# Altium PCB m6_base.PcbDoc
Units mm, origin at the board's own origin, x right, y up, seen from the top; angles counter-clockwise.
Board outline 66 x 85 mm, 2 copper layers (Top Layer, Bottom Layer); 59 components, 64 nets, 244 pads, 162 vias.
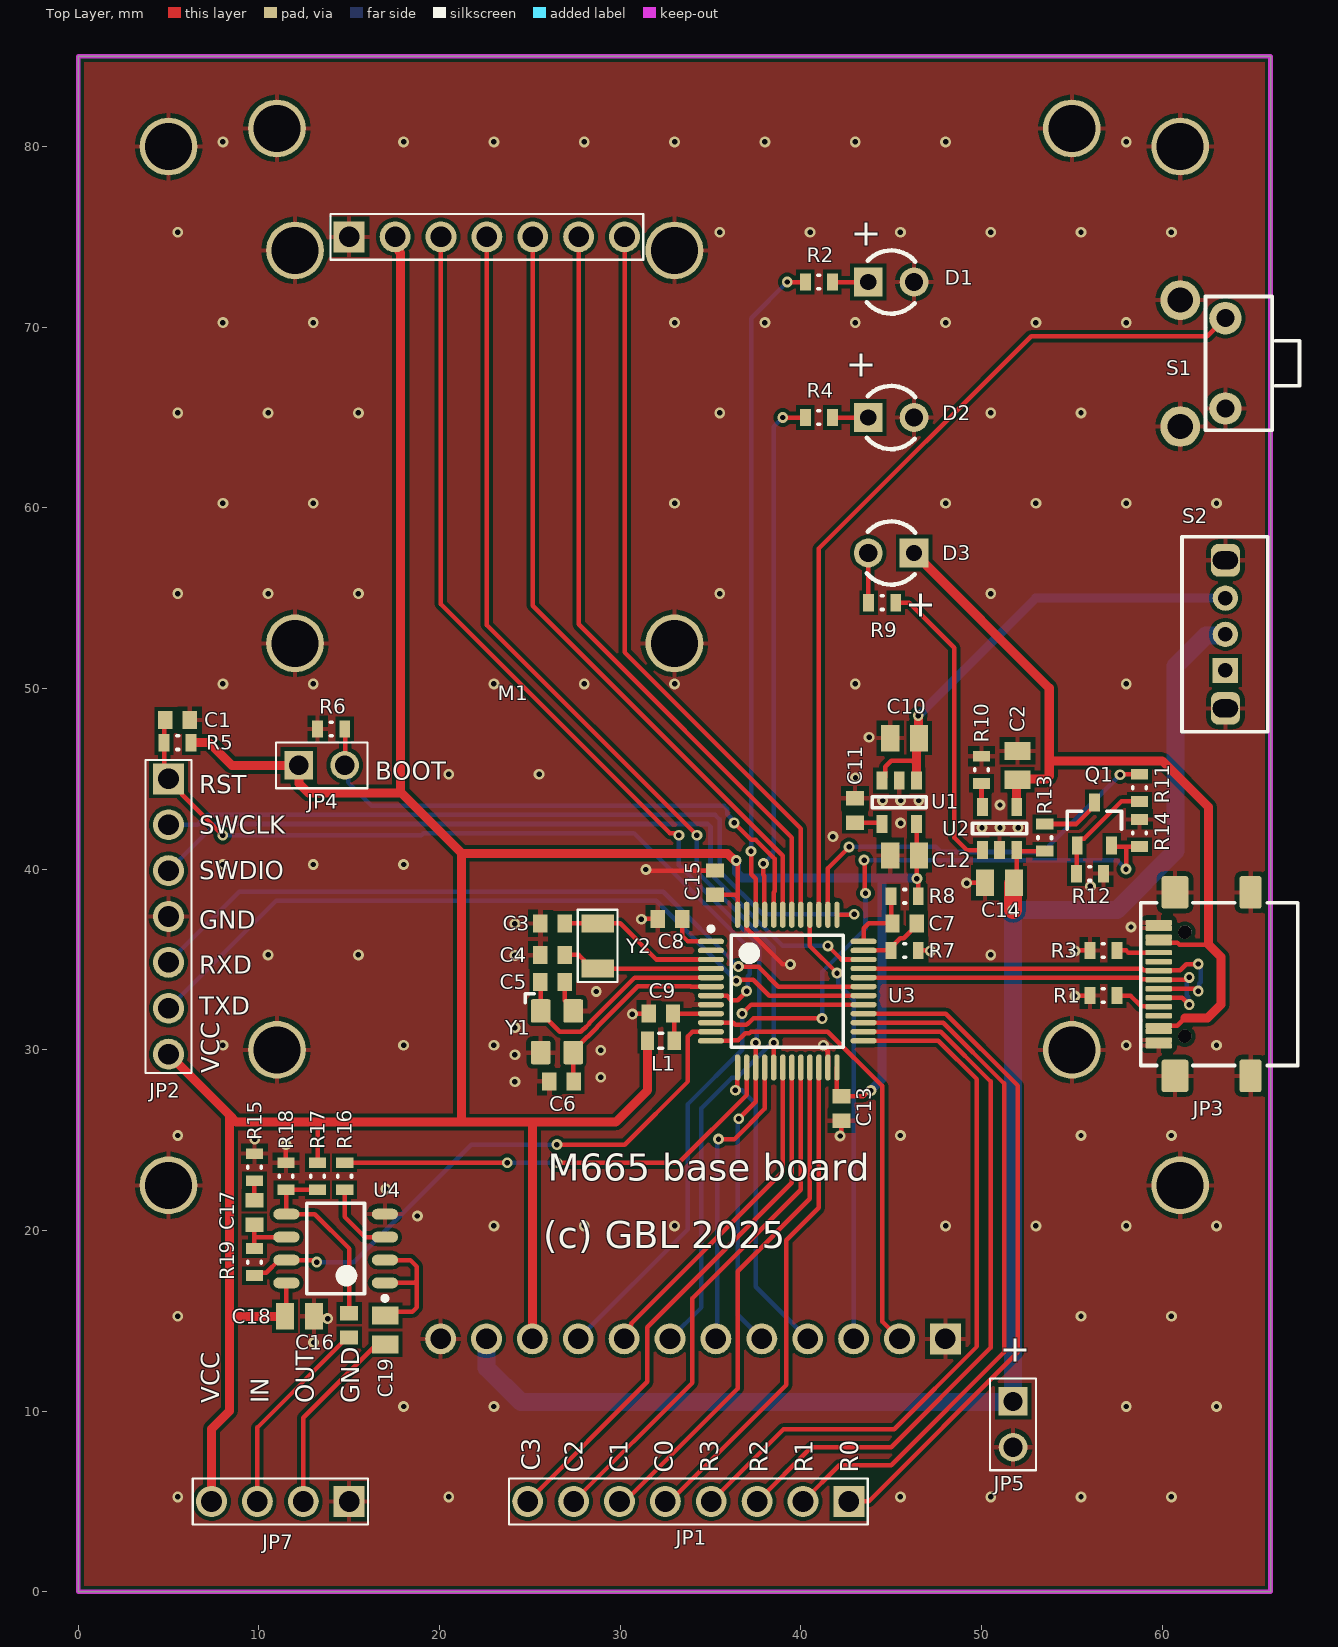
[diagram p0: Top Layer view]
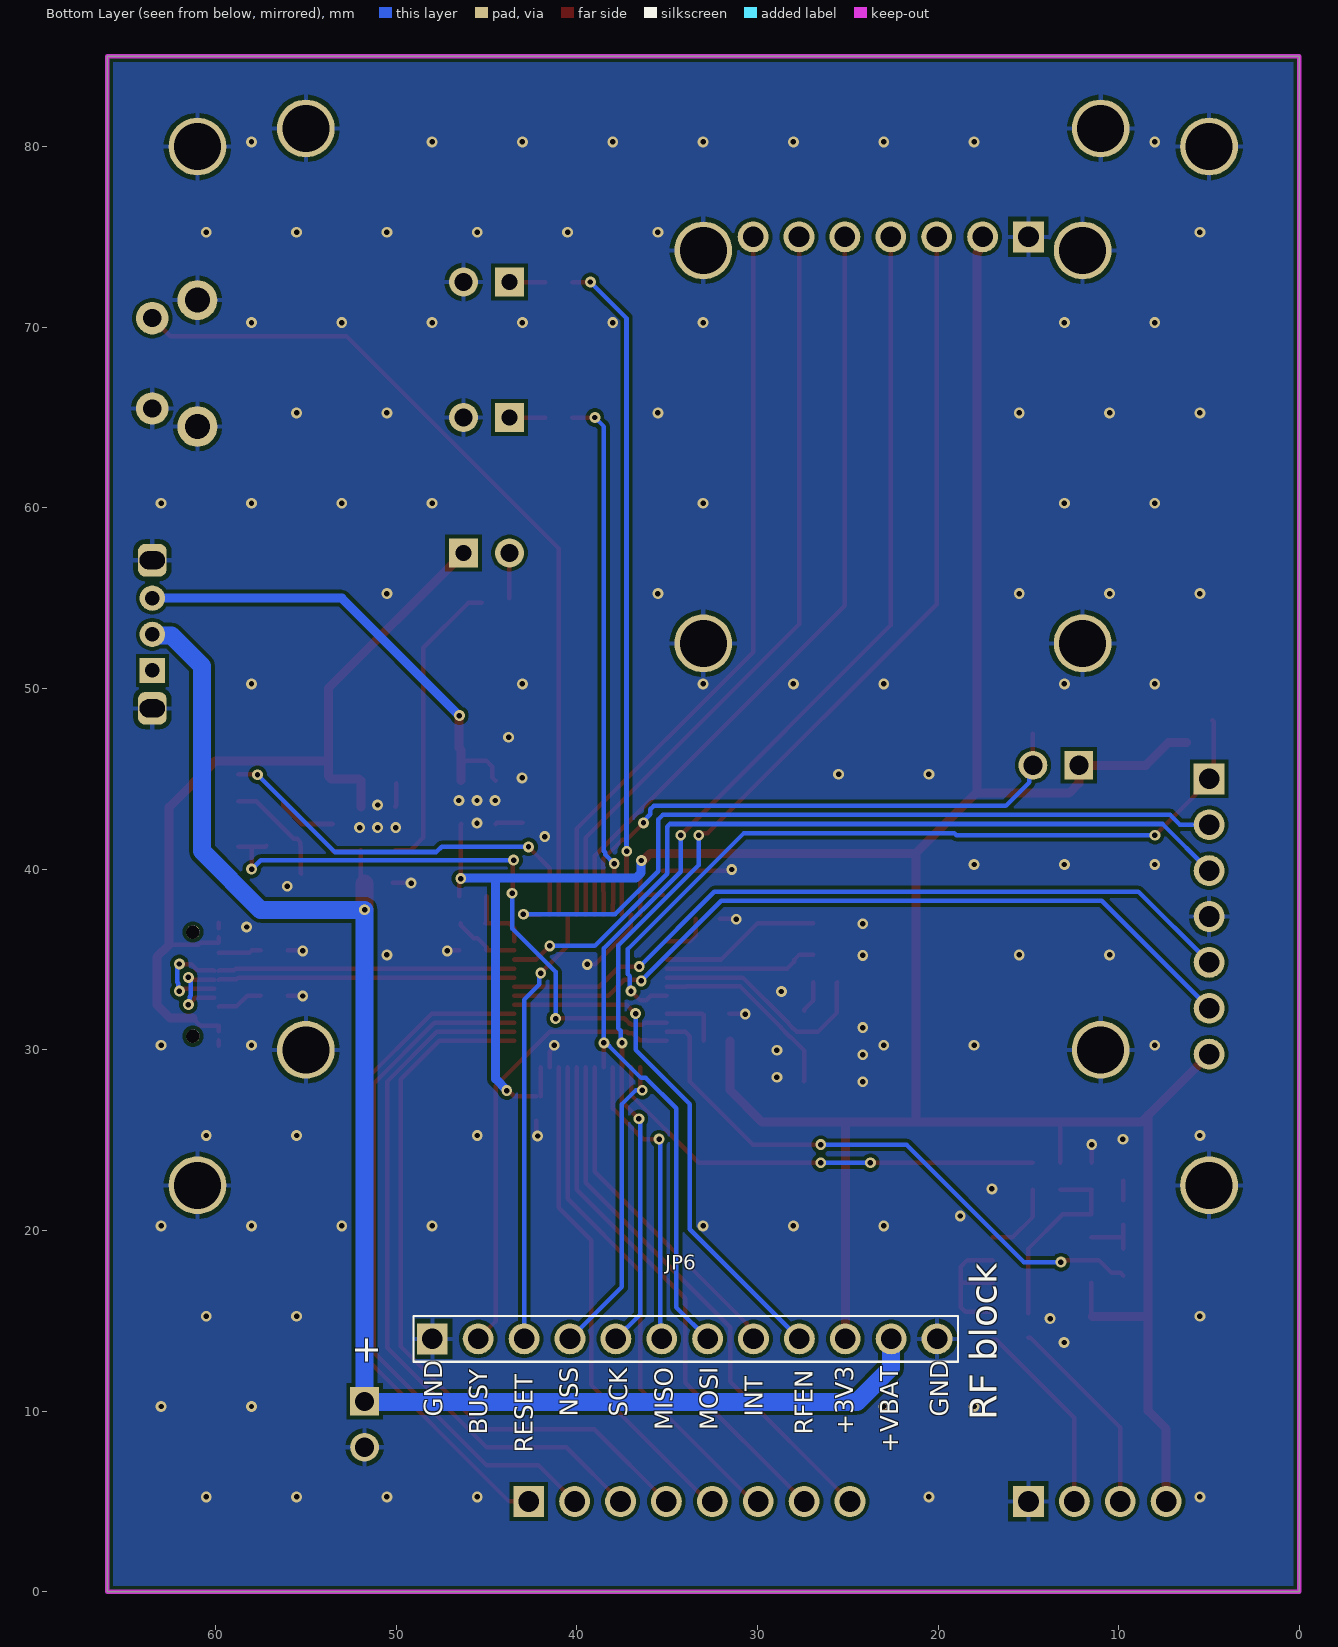
[diagram p1: Bottom Layer view, seen from below]
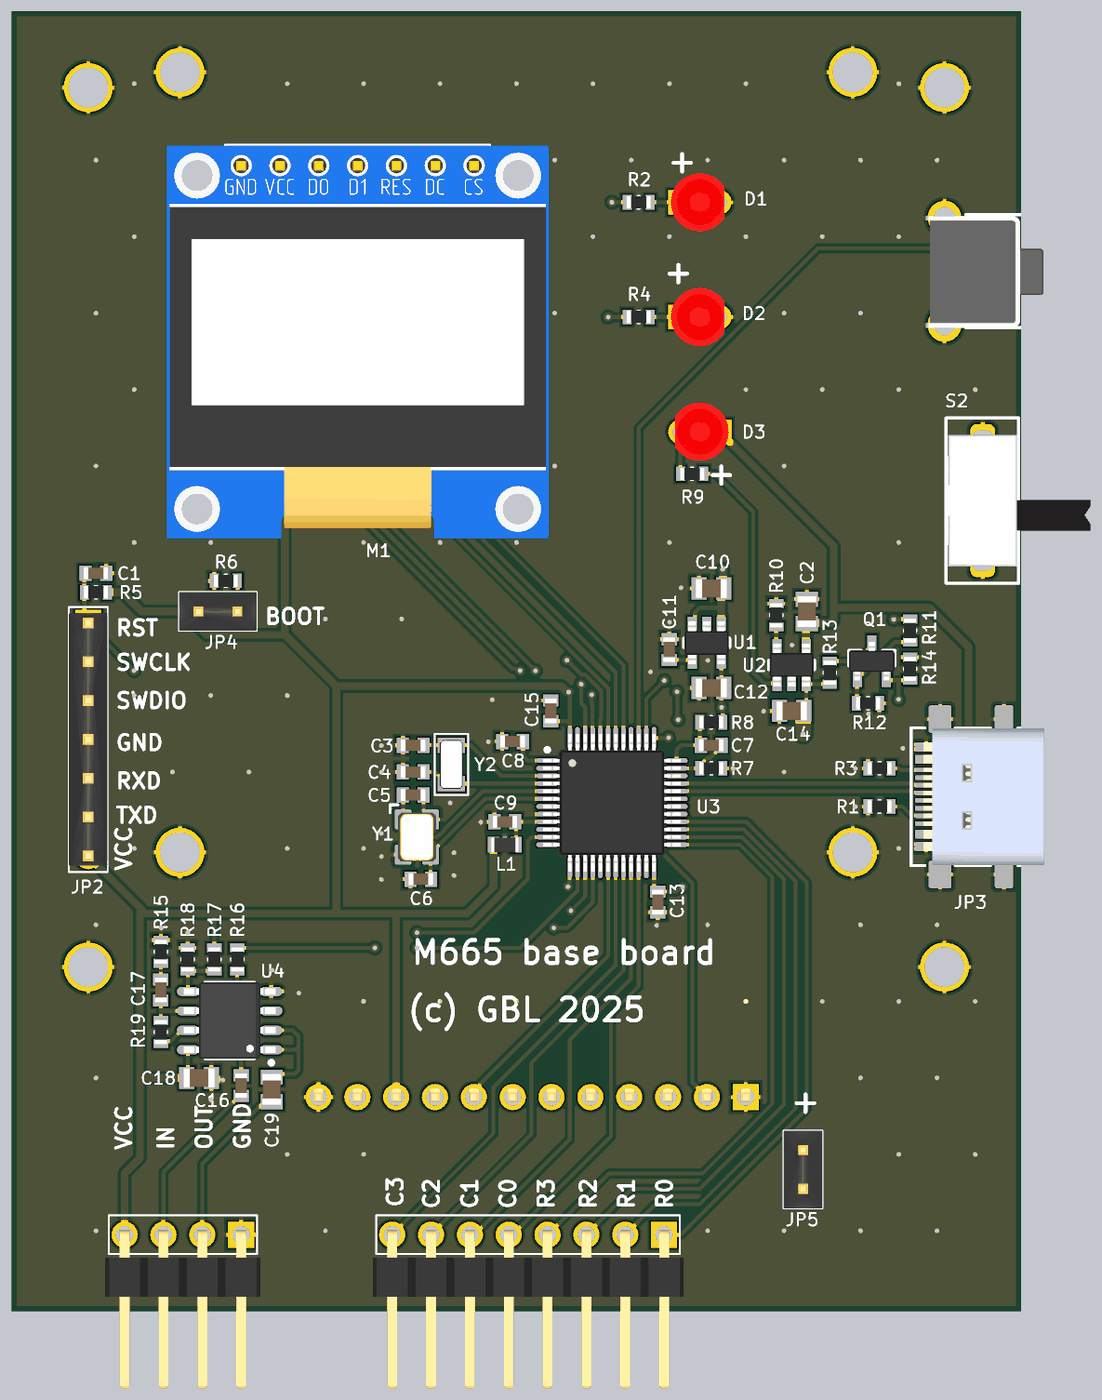
[diagram p2: 3D render of the assembled board from above, using the file's embedded part models]

## Layer stack, top to bottom
Top Solder: solder mask 0.0102, Solder Resist, Dk 3.5
Top Layer: signal copper 0.0356
Dielectric 1: dielectric 0.32, FR-4, Dk 4.8
Bottom Layer: signal copper 0.0356
Bottom Solder: solder mask 0.0102, Solder Resist, Dk 3.5

## Board outline
0,0 66,0 66,85 0,85

## Design rules (kind name [scope] priority, off if disabled: settings)
Clearance [All] p1: gap=0.2 ignorepadtopadclearanceinfootprint=FALSE
ComponentClearance [All] p1: gap=0.2 collisioncheckmode=3 verticalgap=0.2 showdistances=FALSE
HoleSize [All] p1: absolutevalues=TRUE maxlimit=5 minlimit=0.025 maxpercent=80.000 minpercent=20.000
MinimumSolderMaskSliver [All] p1: minsoldermaskwidth=0.05
PolygonConnect PolygonConnect_2 [All vs IsNamedPolygon('GND_L01_P001') Or IsNamedPolygon('GND_L01_P002') Or IsNamedPolygon('GND_L02_P000')] p1: thpad.connectstyle=Relief thpad.reliefconductorwidth=0.254 thpad.reliefentries=4 thpad.polygonreliefangle="90 Angle" thpad.airgapwidth=0.254 smdpad.connectstyle=Relief smdpad.reliefconductorwidth=0.254 smdpad.reliefentries=4 smdpad.polygonreliefangle="90 Angle" smdpad.airgapwidth=0.254 via.connectstyle=Direct via.reliefconductorwidth=0.254 via.reliefentries=4 via.polygonreliefangle="90 Angle" via.airgapwidth=0.254
PolygonConnect PolygonConnect_1 [All vs IsNamedPolygon('GND_L01_P001') Or IsNamedPolygon('GND_L02_P000')] p2: thpad.connectstyle=Relief thpad.reliefconductorwidth=0.254 thpad.reliefentries=4 thpad.polygonreliefangle="90 Angle" thpad.airgapwidth=0.25 smdpad.connectstyle=Relief smdpad.reliefconductorwidth=0.254 smdpad.reliefentries=4 smdpad.polygonreliefangle="90 Angle" smdpad.airgapwidth=0.25 via.connectstyle=Direct via.reliefconductorwidth=0.254 via.reliefentries=4 via.polygonreliefangle="90 Angle" via.airgapwidth=0.254
PolygonConnect [All] p3: connectstyle=Relief reliefconductorwidth=0.254 reliefentries=4 polygonreliefangle="90 Angle" airgapwidth=0.254
RoutingVias [All] p1: holewidth=0.711 width=1.27 viastyle="Through Hole" minholewidth=0.711 minwidth=1.27 maxholewidth=0.711 maxwidth=1.27
SilkToSilkClearance [All] p1: silktosilkclearance=0.1
SilkToSolderMaskClearance [IsPad] p1: minsilkscreentomaskgap=0.05 clearancetoexposedcopper=TRUE
SolderMaskExpansion [All] p1: expansion=0.102 istentingtop=FALSE
Width [All] p1: maxlimit=2 minlimit=0.2 preferedwidth=0.25
25 further rules are at their usual default settings.

## Components (designator, comment, footprint, x,y, rotation, side; value= is the part's Value field where it differs from the comment)
C1 "CAPN" C-0603 5.5,48.25 r180 top
C2 "CAPN" C-0805 52,45.75 r270 top
C3 "CAPN" C-0603 26.25,37 r0 top
C4 "CAPN" C-0603 26.25,35.25 r0 top
C5 "CAPN" C-0603 26.25,33.75 r180 top
C6 "CAPN" C-0603 26.75,28.25 r180 top
C7 "CAPN" C-0603 45.75,37 r180 top
C8 "CAPN" C-0603 32.75,37.25 r180 top
C9 "CAPN" C-0603 32.25,32 r0 top
C10 "CAPN" C-0805 45.75,47.25 r180 top
C11 "CAPN" C-0603 43,43.25 r90 top
C12 "CAPN" C-0805 45.75,40.75 r180 top
C13 "CAPN" C-0603 42.25,26.75 r90 top
C14 "CAPN" C-0805 51,39.25 r0 top
C15 "CAPN" C-0603 35.25,39.25 r270 top
C16 "CAPN" C-0603 15,14.75 r90 top
C17 "CAPN" C-0603 9.75,21 r270 top
C18 "CAPN" C-0805 12.25,15.25 r180 top
C19 "CAPN" C-0805 17,14.5 r270 top
D1 "DLED" LED_3mm_RED 45,72.5 r0 top
D2 "DLED" LED_3mm_RED 45,65 r0 top
D3 "DLED" LED_3mm_RED 45,57.5 r180 top
JP1 "HEADER8" PLS1-8R_1 42.66,5 r180 top
JP2 "HEADER 7" PLS1-7 5,45 r270 top
JP3 "L-KLS1-5473" L-KLS1-5473 59.81,33.635 r90 top
JP4 "JMP 2" PLS1-2 12.21,45.75 r0 top
JP5 "HEADER 2" PLS1-2 51.75,10.54 r270 top
JP6 "HEADER 12" PLS1-12R_1 48,14 r180 bottom locked
JP7 "HEADER4" PLS1-4R 15,5 r180 top
L1 "BEAD" L-0603 32.25,30.5 r180 top
M1 "OLED0_96" OLED096 15,75 r0 top locked
Q1 "MOSF-N" SOT-23 56.25,42.5 r90 top
R1 "5k1" R-0603 56.75,33 r0 top
R2 "RES" R-0603 41,72.5 r180 top
R3 "5k1" R-0603 56.75,35.5 r0 top
R4 "RES" R-0603 41,65 r180 top
R5 "RES" R-0603 5.5,47 r180 top
R6 "RES" R-0603 14,47.75 r0 top
R7 "RES" R-0603 45.75,35.5 r180 top
R8 "RES" R-0603 45.75,38.5 r180 top
R9 "RES" R-0603 44.5,54.75 r180 top
R10 "RES" R-0603 50,45.5 r270 top
R11 "RES" R-0603 58.75,44.5 r90 top
R12 "RES" R-0603 56,39.75 r180 top
R13 "RES" R-0603 53.5,41.75 r270 top
R14 "RES" R-0603 58.75,42 r270 top
R15 "RES" R-0603 9.75,23.5 r270 top
R16 "RES" R-0603 14.75,23 r270 top
R17 "RES" R-0603 13.25,23 r90 top
R18 "RES" R-0603 11.5,23 r90 top
R19 "RES" R-0603 9.75,18.25 r90 top
S1 "KLS7-TS3602 -3 15-180" KLS7-TS3602 63.5,68 r90 top
S2 "SW SPDT" SK-12D07VG5 63.5,53 r90 top
U1 "LP5907MFX-3.0" SOT-23-5 45.45,43.7 r270 top
U2 "MCP73831-2ATI/OT" SOT-23-5 51,42.25 r90 top value={Value}
U3 "AT32F413CBU7" LQFP-48 39.25,33.25 r0 top
U4 "LM2904DR" SO-8 14.25,19 r180 top
Y1 "nc" ZQ_SJK-7U 26.5,31 r270 top
Y2 "Y" KX-327 28.75,35.75 r90 top

## Footprints (in the part's own frame and the unit in brackets; to place one, negate y for a bottom-side part, rotate by r counter-clockwise, add the part's x,y. Pads: shape width x height; smd on the part's side, far side on the other; paste and mask are expansions set on the pad)
C-0603 [mm] "Chip Capacitor, 2-Leads, Body 1,60x0,80mm, IPC Medium Density"
  rect 0.8x1 smd: 1(-0.675,0) 2(0.675,0)
  body extent -0.8,-0.4 0.8,0.4, height 0.8
C-0805 [mm] "Chip Capacitor, 2-Leads, Body 2,00x1,25mm, IPC Medium Density"
  rect 1x1.45 smd: 1(-0.8,0) 2(0.8,0)
  body extent -1,-0.62 1,0.63, height 1.25
KLS7-TS3602 [mm] "miniature switch"
  round 1.8 hole 1: 1(-2.5,0) 2(2.5,0)
  oval 2.25x2.2 hole 1.4: 3(-3.5,2.5)
  round 2.2 hole 1.4: 3(3.5,2.5)
  silkscreen extent -3.7,-4.1 3.7,1.1, body extent -3.7,-3.97 3.6,3.75, height 4.4
KX-327 [mm]
  rect 1x1.8 smd: 1(-1.25,0) 2(1.25,0)
  silkscreen extent -2,-1.1 2,1.1, body extent -1.6,-0.75 1.6,0.75, height 0.71
L-0603 [mm] "Chip Inductor, 2-Leads, Body 1,60x0,80mm, IPC Medium Density"
  rect 0.74x1.02 smd: 1(-0.735,0) 2(0.735,0)
  silkscreen extent -0.1,-0.41 0.1,0.41, body extent -0.9,-0.5 0.9,0.5, height 1
L-KLS1-5473 [mm] "USB 3.1 Type C"
  rrect20% 1.8x1.2 smd mask+0.07: 1(-5.08,-5.08) 1(5.08,-5.08)
  rrect20% 1.8x1.5 smd mask+0.07: 1(-5.08,-0.9) 1(5.08,-0.9)
  rrect30% 0.3x1.45 smd paste-2 mask+0.07: A1(-3.1,0) A4(-2.6,0) A9(2.6,0) A12(3.4,0) B1(3.1,0) B4(2.3,0) B9(-2.3,0) B12(-3.4,0)
  rrect30% 0.3x1.45 smd mask+0.07: A5(-1.25,0) A6(-0.25,0) A7(0.25,0) A8(1.25,0) B5(1.75,0) B6(0.75,0) B7(-0.75,0) B8(-1.75,0)
  round 0.75 hole 0.75 unplated paste-2 mask+0.07: MH(-2.885,-1.44) MH(2.885,-1.44)
  silkscreen extent -4.5,-7.69 4.5,1, body extent -4.47,-7.7 4.47,0.2, height 3.2
LED_3mm_RED [mm]
  rect 1.6x1.6 hole 0.9: 1(-1.27,0)
  round 1.6 hole 1: 2(1.27,0)
  silkscreen extent -1.34,-1.75 1.34,1.75, body extent -1.9,-1.9 1.6,1.9, height 5.75
LQFP-48 [mm] "TSQFP, 48-Leads, Body 7,00x7,00mm, Pitch 0,50mm, IPC Medium Density"
  oval 1.45x0.3 smd: 1(-4.225,2.75) 2(-4.225,2.25) 3(-4.225,1.75) 4(-4.225,1.25) 5(-4.225,0.75) 6(-4.225,0.25) 7(-4.225,-0.25) 8(-4.225,-0.75) 9(-4.225,-1.25) 10(-4.225,-1.75) 11(-4.225,-2.25) 12(-4.225,-2.75) 25(4.225,-2.75) 26(4.225,-2.25) 27(4.225,-1.75) 28(4.225,-1.25) 29(4.225,-0.75) 30(4.225,-0.25) 31(4.225,0.25) 32(4.225,0.75) 33(4.225,1.25) 34(4.225,1.75) 35(4.225,2.25) 36(4.225,2.75)
  oval 0.3x1.45 smd: 13(-2.75,-4.225) 14(-2.25,-4.225) 15(-1.75,-4.225) 16(-1.25,-4.225) 17(-0.75,-4.225) 18(-0.25,-4.225) 19(0.25,-4.225) 20(0.75,-4.225) 21(1.25,-4.225) 22(1.75,-4.225) 23(2.25,-4.225) 24(2.75,-4.225) 37(2.75,4.225) 38(2.25,4.225) 39(1.75,4.225) 40(1.25,4.225) 41(0.75,4.225) 42(0.25,4.225) 43(-0.25,4.225) 44(-0.75,4.225) 45(-1.25,4.225) 46(-1.75,4.225) 47(-2.25,4.225) 48(-2.75,4.225)
  silkscreen extent -4.35,-3.1 3.1,3.57, body extent -4.5,-4.5 4.5,4.5, height 1.5
OLED096 [mm] "Header, Vertical, 2.54 mm pitch; 0.70 mm lead width, 7 pins, 1 row, 7 pins per row, 16.51 mm L X 2.54 mm W X 7.54 mm H body"
  rect 1.71x1.71 hole 1.14 paste-1.71: 1(0,0)
  round 1.71 hole 1.14 paste-1.71: 2(2.54,0) 3(5.08,0) 4(7.62,0) 5(10.16,0) 6(12.7,0) 7(15.24,0)
  silkscreen extent -1.04,-1.27 16.28,1.27, body extent -4.88,-24.5 20.12,1.2, height 9.08
PLS1-2 [mm] "Header, Vertical, 2.54 mm pitch; 0.64 mm lead width, 2 pins, 1 row, 2 pins per row, 5.08 mm L X 2.54 mm W X 8.54 mm H body"
  rect 1.59x1.59 hole 1.06 paste-1.59: 1(0,0)
  round 1.59 hole 1.06 paste-1.59: 2(2.54,0)
  silkscreen extent -1.27,-1.27 3.81,1.27, body extent -1.27,-1.27 3.81,1.27, height 8.54
PLS1-4R [mm] "Header, Vertical, 2.54 mm pitch; 0.70 mm lead width, 4 pins, 1 row, 4 pins per row, 8.89 mm L X 2.54 mm W X 7.54 mm H body"
  rect 1.71x1.71 hole 1.14 paste-1.71: 1(0,0)
  round 1.71 hole 1.14 paste-1.71: 2(2.54,0) 3(5.08,0) 4(7.62,0)
  silkscreen extent -1.04,-1.27 8.66,1.27, body extent -1.27,-0.32 8.89,10.04, height 2.54
PLS1-7 [mm] "Header, Vertical, 2.54 mm pitch; 0.70 mm lead width, 7 pins, 1 row, 7 pins per row, 16.51 mm L X 2.54 mm W X 7.54 mm H body"
  rect 1.71x1.71 hole 1.14 paste-1.71: 1(0,0)
  round 1.71 hole 1.14 paste-1.71: 2(2.54,0) 3(5.08,0) 4(7.62,0) 5(10.16,0) 6(12.7,0) 7(15.24,0)
  silkscreen extent -1.04,-1.27 16.28,1.27, body extent -0.64,-1.27 15.88,1.27, height 7.54
PLS1-8R_1 [mm] "Header, Vertical, 2.54 mm pitch; 0.70 mm lead width, 8 pins, 1 row, 8 pins per row, 19.05 mm L X 2.54 mm W X 7.54 mm H body"
  rect 1.71x1.71 hole 1.14 paste-1.71: 1(0,0)
  round 1.71 hole 1.14 paste-1.71: 2(2.54,0) 3(5.08,0) 4(7.62,0) 5(10.16,0) 6(12.7,0) 7(15.24,0) 8(17.78,0)
  silkscreen extent -1.04,-1.27 18.82,1.27, body extent -1.27,-0.32 19.05,10.04, height 2.54
PLS1-12R_1 [mm] "Header, Vertical, 2.54 mm pitch; 0.70 mm lead width, 10 pins, 1 row, 10 pins per row, 24.13 mm L X 2.54 mm W X 7.54 mm H body"
  rect 1.71x1.71 hole 1.14 paste-1.71: 1(0,0)
  round 1.71 hole 1.14 paste-1.71: 2(2.54,0) 3(5.08,0) 4(7.62,0) 5(10.16,0) 6(12.7,0) 7(15.24,0) 8(17.78,0) 9(20.32,0) 10(22.86,0) 11(25.4,0) 12(27.94,0)
  silkscreen extent -1.04,-1.27 29.1,1.27, body extent -1.27,-0.32 29.21,10.04, height 5.04
R-0603 [mm] "Chip Resistor, 2-Leads, Body 1,60x0,82mm, IPC Medium Density"
  rect 0.6x0.95 smd: 1(-0.75,0) 2(0.75,0)
  silkscreen extent -0.05,-0.38 0.05,0.38, body extent -0.8,-0.4 0.8,0.4, height 0.45
SK-12D07VG5 [mm]
  rect 1.4x1.4 hole 0.8: 1(-2,0)
  round 1.4 hole 0.8: 2(0,0) 3(2,0)
  rrect50% 1.8x1.6 hole 1 slot 1.4 at 90 deg: S1(-4.1,0) S1(4.1,0)
  silkscreen extent -5.4,-2.35 5.4,2.4, body extent -4.3,-7.05 4.3,2.3, height 4.75
SO-8 [mm] "SOIC, 8-Leads, Body 4,90x3,90mm, Pitch 1,27mm, IPC Medium Density"
  oval 1.45x0.6 smd: 1(-2.725,1.905) 2(-2.725,0.635) 3(-2.725,-0.635) 4(-2.725,-1.905) 5(2.725,-1.905) 6(2.725,-0.635) 7(2.725,0.635) 8(2.725,1.905)
  silkscreen extent -2.85,-2.5 1.6,2.88, body extent -3,-2.5 3,2.5, height 1.75
SOT-23 [mm]
  rect 1x0.6 smd: 1(-1.2,0.95) 2(-1.2,-0.95) 3(1.2,0)
  silkscreen extent -0.3,-1.5 0.7,1.5, body extent -1.25,-1.5 1.25,1.5, height 1.2
SOT-23-5 [mm] "SOT23, 5-Leads, Body 2,90x2,45mm, Pitch 0,95mm, IPC Medium Density"
  rect 1x0.6 smd: 1(-1.2,0.95) 2(-1.2,0) 3(-1.2,-0.95) 4(1.2,-0.95) 5(1.2,0.95)
  silkscreen extent -0.3,-1.5 0.3,1.5, body extent -1.4,-1.45 1.4,1.45, height 1.55
ZQ_SJK-7U [mm]
  rrect20% 1.3x1.1 smd mask+0.06: 1(-1.15,-0.9) 2(1.15,-0.9) 3(1.15,0.9) 4(-1.15,0.9)
  silkscreen extent -2.1,-1.75 -1.6,-1.25, body extent -1.6,-1.25 1.6,1.25, height 0.6

## Part data
C1 C2 C3 C4 C5 C6 C7 C8 C9 C10 C11 C12 C13 C14 C15 C16 C17 C18 C19: Voltage=50V, Вид=Конденсатор, Точність/група=NP0
R1 R3: library part RES, Вид=Резистор, Точність/група=5%
S1: library part SW-1, Вид=Кнопка
U1: library part LP5907, "250mA Low-Dropout Regulator", Вид=Мікросхема
U2: Man#Part Num#=TPS61023DRLT, Manufacturer="Texas Instruments", Package=SOT-563, Temperature Range="-40°C ~ 125°C (TJ)", Component Type=SMD, Footprint Part=IC-package.PcbLib, IC Type=PMIC, Library Part=IC`s.SchLib, Mounting  Method=SMD, Part Number=MCP73831-2ATI/OT, Part Type=IC, Suplier 1=https://www.digikey.com.au/en/products/detail/texas-instruments/TPS61023DRLT/11310622?s=N4IgTCBcDaICoAUDKA2AjABjAZgCICUAZOEAXQF8g, URL=https://www.ti.com/general/docs/suppproductinfo.tsp?distId=10&gotoUrl=https%3A%2F%2Fwww.ti.com%2Flit%2Fgpn%2Ftps61023
U4: library part LM2904, "Dual Operational Amplifiers, SOIC-8", Вид=Мікросхема
Y1: library part TSX-3225, "Crystal, 24 MHz, 9 pF, SMD", Вид=Трансформатор
D1 D2 D3: Вид=Світлодіод
JP1 JP2 JP4 JP5 JP6 JP7: Вид=Роз'єм
JP3: Mounting  Method=SMD
L1: Вид="Ferrite bead"
Q1: Вид=Транзистор
R2 R4 R5 R6 R7 R8 R9 R10 R11 R12 R13 R14 R15 R16 R17 R18 R19: Вид=Резистор, Точність/група=5%
S2: Вид=Перемикач
U3: Вид=Мікросхема
Y2: Вид=Кварц, Точність/група=20ppm

## Free pads (board coordinates)
  round 3.2 hole 2.6: 1(5,22.5) 1(5,80) 1(11,30) 1(11,81) 1(12,52.5) 1(12,74.25) 1(33,52.5) 1(33,74.25) 1(55,30) 1(55,81) 1(61,22.5) 1(61,80)

## Via types
v1: diameter 0.6, hole 0.3, Top Layer to Bottom Layer, tented both sides, 162 vias

## Nets (pads, with @x,y where several pads share a name; then routed paths per layer and width w, separated by ;. In a path a pad name is that pad's centre, name@x,y a point inside that pad or via, vN(x,y) a via of type N, cw(c..) or ccw(c..) an arc to the next point about the centre after c; other vN are vias at no path point)
ADC_IN: R19.1 U3.11 U4.7 | length 32.4
  Top Layer w0.25: R19.1 9.903,17.653 10.403,17.653 11.115,18.365 12.993,18.365 13.108,18.25 v1(13.203,18.25) ; v1(26.5,24.75) 30.25,24.75 33.75,28.25 33.75,30.75 34,31 U3.11
  Bottom Layer w0.25: v1(13.203,18.25) 15.25,18.25 21.75,24.75 v1(26.5,24.75)
AUDIO_IN: C16.1 JP7.3 | length 11.2
  Top Layer w0.25: JP7.3 9.92,9.095 14.9,14.075 C16.1
AUDIO_OUT: C19.2 JP7.2 | length 11
  Top Layer w0.25: JP7.2 12.46,9.635 16.775,13.95 C19.2@17,13.95
BAT_LEVEL: Q1.2 R14.2 U3.10 | length 33.8
  Top Layer w0.25: U3.10 36.253,31.5 36.378,31.375 36.971,31.375 37.052,31.457 37.086,31.457 37.38,31.75 v1@41.25,31.75 ; v1(43.5,40.5) 43.539,40.461 43.539,38.711 v1(43.579,38.671) ; Q1.2 57.25,41.25 58,41.25 ; v1(58,40) 58,41.25 ; R14.2 58,41.25
  Bottom Layer w0.25: v1(41.174,31.729) 41.174,34.308 43.579,36.713 v1(43.579,38.671) ; v1(43.5,40.5) 57.5,40.5 v1(58,40)
BAT_MEAS: R11.2 U3.38 | length 22.3
  Top Layer w0.25: U3.38 41.5,40.055 v1(42.674,41.229) ; v1@57.5,45.25 R11.2
  Bottom Layer w0.25: v1@42.75,41.25 47.475,41.25 47.775,40.95 53.395,40.95 v1(57.674,45.229)
BOOT: JP4.2 R6.2 U3.44 | length 32
  Top Layer w0.25: R6.2@14.75,47.5 14.77,47.48 14.77,45.27 JP4.2@14.79,45.25 ; v1(36.308,42.558) 37.251,41.615 37.499,41.615 38.55,40.564 38.55,38.78 38.5,38.73 U3.44
  Bottom Layer w0.25: JP4.2 14.952,45.548 14.952,44.798 16.25,43.5 35.75,43.5 35.927,43.323 35.927,43.034 36.308,42.653 v1(36.308,42.558)
C0: JP1.5 U3.22 | length 27.7
  Top Layer w0.25: JP1.5 32.75,5 39.2,11.45 39.2,19.45 41,21.25 U3.22
C1: JP1.6 U3.21 | length 28.6
  Top Layer w0.25: JP1.6 30.25,5 36.5,11.25 36.5,17.75 40.5,21.75 U3.21
C2: JP1.7 U3.20 | length 29.2
  Top Layer w0.25: JP1.7 34,11.58 34,16.25 40,22.25 U3.20
C3: JP1.8 U3.19 | length 30.1
  Top Layer w0.25: JP1.8 31.5,11.62 31.5,14.644 39.5,22.644 U3.19
DAC_OUT: R16.1 U3.14 | length 25.3
  Top Layer w0.25: R16.1 v1(23.75,23.75) ; v1(26.5,23.75) 33.25,23.75 37,27.5 U3.14
  Bottom Layer w0.25: v1(23.75,23.75) v1(26.5,23.75)
DM: JP3.A7 JP3.B7 U3.32 | length 20.8
  Top Layer w0.25: U3.32 58.75,34 58.84,33.91 59.785,33.91 JP3.A7 ; JP3.B7@60.06,32.885 61.115,32.885 v1(61.5,32.5) ; JP3.A7@60.06,33.885 v1@61.28,33.885
  Bottom Layer w0.25: v1(61.5,32.5) 61.433,32.567 61.433,32.933 61.375,32.991 61.375,33.79 61.5,33.915 v1(61.5,34.01)
DP: JP3.A6 JP3.B6 U3.33 | length 22.1
  Top Layer w0.25: U3.33 58.887,34.5 58.977,34.41 59.785,34.41 JP3.B6 ; JP3.A6@60.06,33.385 61.77,33.385 61.905,33.25 v1(62,33.25) ; JP3.B6@60.06,34.385 60.085,34.41 61.005,34.41 61.325,34.73 61.98,34.73 v1(62,34.75)
  Bottom Layer w0.25: v1(62,33.25) 62.067,33.317 62.067,33.693 62.125,33.751 62.125,34.53 62,34.655 v1(62,34.75)
GND: C1.1 C2.1 C3.1 C4.1 C5.1 C6.2 C8.2 C9.1 C10.2 C11.2 C12.2 C13.1 C14.1 C15.1 C18.1 D1.2 D2.2 JP2.4 JP3.1 JP3.A1 JP3.A12 JP3.B1 JP3.B12 JP5.2 JP6.1 JP6.12 JP7.1 M1.1 pad.1 R1.1 R3.1 R6.1 R7.1 R10.1 R12.1 R14.1 R15.1 R18.2 S1.1 S1.3 S2.S1 U1.2 U2.2 U3.8 U3.23 U3.47 U4.4 Y1.2 Y1.4 | length 18.2
  Top Layer w0.25: R18.2 v1(11.5,24.75) ; C5.1 26.925,32.725 27.4,32.25 Y1.4 ; v1@30.75,32 C9.1 ; v1@31.25,37.25 C8.2 ; v1@31.5,40 31.575,39.925 C15.1 ; U3.47 37.01,37.465 37.01,36.719 38.978,34.75 v1@39.5,34.75 ; v1(41.25,30.25) 41.25,30.155 41.49,29.915 41.49,29.035 U3.23 ; v1@42.25,25.25 C13.1 ; R7.1 v1@47.25,35.5 ; v1@49.25,39.25 C14.1 ; v1@55.25,33 R1.1 ; v1@55.25,35.5 R3.1 ; JP3.B12 JP3.A1 ; JP3.B1 JP3.A12
  other v1: 5.51,5.256 20.51,5.256 45.51,5.256 50.51,5.256 55.51,5.256 60.51,5.256 18.01,10.256 23.01,10.256 58.01,10.256 63.01,10.256 13.026,13.8 13.804,15.123 5.51,15.256 55.51,15.256 60.51,15.256 23.01,20.256 28.01,20.256 33.01,20.256 48.01,20.256 53.01,20.256 58.01,20.256 63.01,20.256 18.776,20.8 17.026,22.3 9.776,25.05 42.174,25.229 5.51,25.256 45.51,25.256 55.51,25.256 60.51,25.256 24.174,28.229 28.924,28.479 24.174,29.729 28.924,29.979 8.01,30.256 18.01,30.256 23.01,30.256 58.01,30.256 63.01,30.256 24.174,31.229 30.674,31.979 55.174,32.979 28.674,33.229 39.424,34.729 24.174,35.229 10.51,35.256 15.51,35.256 50.51,35.256 47.174,35.479 55.174,35.479 58.276,36.8 24.174,36.979 31.174,37.229 56.026,39.05 49.174,39.229 31.424,39.979 8.01,40.256 13.01,40.256 18.01,40.256 41.776,41.8 50.026,42.3 51.026,42.3 52.026,42.3 45.526,42.55 51.026,43.55 44.526,43.8 45.526,43.8 46.526,43.8 43.026,45.05 20.51,45.256 25.51,45.256 43.776,47.3 8.01,50.256 13.01,50.256 23.01,50.256 28.01,50.256 33.01,50.256 43.01,50.256 58.01,50.256 5.51,55.256 10.51,55.256 15.51,55.256 35.51,55.256 50.51,55.256 8.01,60.256 13.01,60.256 33.01,60.256 48.01,60.256 53.01,60.256 58.01,60.256 63.01,60.256 5.51,65.256 10.51,65.256 15.51,65.256 35.51,65.256 50.51,65.256 55.51,65.256 8.01,70.256 13.01,70.256 33.01,70.256 38.01,70.256 43.01,70.256 48.01,70.256 53.01,70.256 58.01,70.256 5.51,75.256 35.51,75.256 40.51,75.256 45.51,75.256 50.51,75.256 55.51,75.256 60.51,75.256 8.01,80.256 18.01,80.256 23.01,80.256 28.01,80.256 33.01,80.256 38.01,80.256 43.01,80.256 48.01,80.256 58.01,80.256
GREEN: R2.2 U3.46 | length 37
  Top Layer w0.25: v1(37.24,40.99) 37.25,40.98 37.25,39.722 37.5,39.472 U3.46 ; v1(39.25,72.5) R2.2
  Bottom Layer w0.25: v1(37.24,40.99) 37.25,41 37.25,70.5 v1(39.25,72.5)
MISO: JP6.6 U3.16 | length 16.7
  Top Layer w0.25: v1(35.442,25.058) 36.326,25.058 37.192,25.924 37.192,25.942 38,26.75 U3.16
  Bottom Layer w0.25: JP6.6 35.375,14.075 35.375,24.991 v1(35.442,25.058)
MOSI: JP6.7 M1.4 U3.17 | length 71.5
  Top Layer w0.25: M1.4 22.62,53.514 34.25,41.884 v1(34.25,41.875) ; U3.17 v1(38.5,30.384)
  Bottom Layer w0.25: JP6.7 34.5,15.74 34.5,26.768 36.176,28.444 36.444,28.444 38.215,30.215 38.236,30.215 v1@38.442,30.421 ; v1(34.25,41.875) 34.25,39.864 38.5,35.614 v1(38.5,30.384)
NetC3_2: C3.2 U3.3 Y2.2 | length 8.9
  Top Layer w0.25: C3.2 Y2.2 30,37 32,35 U3.3
NetC4_2: C4.2 U3.4 Y2.1 | length 8.5
  Top Layer w0.25: C4.2 27.7,35.25 27.975,34.975 27.975,34.875 28.35,34.5 Y2.1 U3.4
NetC5_2: C5.2 U3.5 Y1.1 | length 12.8
  Top Layer w0.25: C5.2 25.6,33.725 Y1.1 25.6,32.05 26.65,31 27.814,31 27.989,31.175 28.02,31.175 28.275,31.43 28.275,31.461 30.814,34 U3.5
NetC6_1: C6.1 U3.6 Y1.3 | length 10.8
  Top Layer w0.25: C6.1 27.4,28.275 27.4,29.95 28.175,30.725 28.207,30.725 28.725,31.243 28.725,31.275 30.964,33.514 33.901,33.514 33.915,33.5 U3.6
NetC7_1: C7.1 R7.2 U3.35 | length 3.7
  Top Layer w0.25: U3.35 R7.2 45,35.675 45.5,36.175 45.7,36.175 46.425,36.9 C7.1
NetC7_2: C7.2 R8.2 U3.36 | length 4
  Top Layer w0.25: U3.36 43.475,36.725 43.75,37 C7.2 45,37.075 R8.2
NetC8_1: C8.1 U3.1 | length 2.7
  Top Layer w0.25: C8.1 33.425,36.325 33.75,36 U3.1
NetC9_2: C9.2 L1.1 U3.9 | length 3.5
  Top Layer w0.25: L1.1 32.985,31.94 33.045,32 U3.9
NetC11_1: C11.1 U1.4 | length 1.5
  Top Layer w0.25: C11.1 44.425,42.575 U1.4
NetC16_2: C16.2 R17.1 R18.1 U4.5 | length 10.9
  Top Layer w0.25: R17.1 R18.1 11.525,22.225 U4.5 13.095,20.905 15,19 C16.2
NetC17_1: C17.1 R15.2 | length 1.1
  Top Layer w0.25: C17.1 R15.2
NetC17_2: C17.2 R19.2 U4.6 | length 3.1
  Top Layer w0.25: R19.2 9.75,19.663 ; C17.2 9.75,19.663 ; U4.6 9.778,19.635 9.75,19.663
NetC19_1: C19.1 U4.1 U4.2 | length 7.9
  Top Layer w0.25: U4.1 18.595,17.095 18.75,17.25 ; U4.2 18.385,18.365 18.75,18 18.75,17.25 ; C19.1@17,15.55 17.05,15.5 18.5,15.5 18.75,15.75 18.75,17.25
NetD1_1: D1.1 R2.1 | length 2
  Top Layer w0.25: R2.1 D1.1
NetD2_1: D2.1 R4.1 | length 2
  Top Layer w0.25: R4.1 D2.1
NetD3_2: D3.2 R9.2 | length 2.5
  Top Layer w0.25: D3.2 43.73,55.02 R9.2@43.75,55
NetJP3_A5: JP3.A5 R1.2 | length 2.6
  Top Layer w0.25: R1.2 58.25,33 58.84,32.41 59.785,32.41 JP3.A5
NetJP3_B5: JP3.B5 R3.2 | length 2.4
  Top Layer w0.25: R3.2 58,35.5 58.115,35.385 JP3.B5
NetQ1_1: Q1.1 R11.1 R12.2 | length 6.2
  Top Layer w0.25: R12.2 55.275,39.775 55.275,41.275 Q1.1 55.3,41.5 55.475,41.675 55.675,41.675 57.75,43.75 R11.1
NetQ1_3: Q1.3 R13.1 | length 3.4
  Top Layer w0.25: R13.1 55.25,42.5 56.25,43.5 Q1.3
NetR9_1: R9.1 U2.1 | length 16.6
  Top Layer w0.25: R9.1 46,54.75 48.5,52.25 48.5,41.75 49.2,41.05 U2.1
NetR10_2: R10.2 U2.5 | length 1.3
  Top Layer w0.25: R10.2 50,43.5 U2.5
NetR16_2: R16.2 U4.3 | length 4.2
  Top Layer w0.25: R16.2 14.75,20.75 15.865,19.635 U4.3
NRST: C1.2 JP2.1 R5.2 U3.7 | length 44
  Top Layer w0.25: JP2.1@4.75,45.25 R5.2 4.75,48.175 C1.2 ; JP2.1 5.73,44.27 5.73,44.145 v1(8,41.875) ; U3.7 35.035,32.99 35.915,32.99 36.155,32.75 36.5,32.75 v1(37,33.25)
  Bottom Layer w0.25: v1(8,41.875) 18.985,41.875 19.11,42 30.75,42 37.169,35.581 37.169,34.19 37.059,34.081 37.059,33.309 v1(37,33.25)
OLED_CS: M1.7 U3.41 | length 41.6
  Top Layer w0.25: M1.7 30.24,52.01 40,42.25 U3.41
OLED_DC: M1.6 U3.42 | length 42.4
  Top Layer w0.25: M1.6 27.7,53.55 39.5,41.75 U3.42
OLED_RST: M1.5 U3.43 | length 43.3
  Top Layer w0.25: M1.5 25.16,54.59 39,40.75 U3.43
PTT: S1.2 U3.39 | length 48.1
  Top Layer w0.25: U3.39 41,57.75 52.75,69.5 62.5,69.5 S1.2
R0: JP1.1 U3.28 | length 37.7
  Top Layer w0.25: JP1.1 43.75,5 52,13.25 52,28.023 48.023,32 U3.28
R1: JP1.2 U3.27 | length 38.6
  Top Layer w0.25: JP1.2 42.12,7 45,7 51.25,13.25 51.25,28.136 47.886,31.5 U3.27
R2: JP1.3 U3.26 | length 39.4
  Top Layer w0.25: JP1.3 40.58,8 45,8 50.5,13.5 50.5,28.25 47.75,31 U3.26
R3: JP1.4 U3.25 | length 40.2
  Top Layer w0.25: JP1.4 39.04,9 45.17,9 49.75,13.58 49.75,28.364 47.614,30.5 U3.25
RED: R4.2 U3.45 | length 29.3
  Top Layer w0.25: v1(37.925,40.305) 37.925,39.684 37.975,39.634 37.975,38.089 38,38.064 U3.45 ; v1(39,65) R4.2
  Bottom Layer w0.25: v1(37.925,40.305) 38.432,40.812 38.432,40.929 38.5,40.997 38.5,64.5 v1(39,65)
RF_BUSY: JP6.2 U3.12 | length 25.3
  Top Layer w0.25: U3.12 35.035,30.51 36.101,30.51 36.117,30.525 36.525,30.525 36.75,30.75 36.75,30.759 36.916,30.925 37.157,30.925 37.241,31.009 41.491,31.009 44.5,28 44.5,14.96 JP6.2
RF_CS: JP6.4 U3.13 | length 17
  Top Layer w0.25: v1(36.375,27.759) 36.375,27.854 36.49,27.969 36.49,29.015 U3.13
  Bottom Layer w0.25: v1(36.375,27.759) 36.384,27.75 36.75,27.75 37.5,27 37.5,16.88 JP6.4
RF_EN: JP6.9 U3.29 | length 28.7
  Top Layer w0.25: v1(36.748,32.003) 37.246,32.5 U3.29
  Bottom Layer w0.25: JP6.9 33.75,20.07 33.75,27 36.75,30 36.75,32.001 v1(36.748,32.003)
RF_INT: JP6.8 U3.18 | length 18.7
  Top Layer w0.25: JP6.8 30.22,14.395 30.605,14.78 30.605,14.855 39,23.25 U3.18
RF_RST: JP6.3 U3.40 | length 24.5
  Top Layer w0.25: U3.40 40.5,35.75 v1(42,34.25)
  Bottom Layer w0.25: v1(42,34.25) 42.067,34.183 42.067,33.633 42.92,32.78 JP6.3
RXD: JP2.5 U3.31 | length 42.3
  Top Layer w0.25: v1(36.544,34.608) 36.56,34.592 37.658,34.592 38.75,33.5 U3.31
  Bottom Layer w0.25: JP2.5 8.91,38.75 32.384,38.75 36.526,34.608 v1(36.544,34.608)
SCK: JP6.5 M1.3 U3.15 | length 69.6
  Top Layer w0.25: M1.3 20.08,54.67 32.75,42 33.03,42 33.155,41.875 v1(33.25,41.875) ; v1(36.567,26.183) 37.5,27.116 U3.15 37.499,29.026 v1(37.498,30.382) v1(37.498,30.382)
  Bottom Layer w0.25: v1(33.25,41.875) 33.25,40.227 37.7,35.777 37.7,31.184 37.565,31.049 37.565,30.449 v1(37.498,30.382) ; v1(36.567,26.183) 36.5,26.116 36.5,15.34 JP6.5
SWCLK: JP2.2 U3.37 | length 43.1
  Top Layer w0.25: U3.37 42.975,37.475 v1@43,37.5
  Bottom Layer w0.25: JP2.2 6.613,42.46 7.153,43 35.25,43 35.5,42.75 35.5,39.886 37.883,37.504 v1(42.954,37.504)
SWDIO: JP2.3 U3.34 | length 44.2
  Top Layer w0.25: v1(41.5,35.75) 42.25,35 U3.34
  Bottom Layer w0.25: JP2.3 7.58,42.5 34.854,42.5 35,42.354 35,39.75 39,35.75 v1(41.5,35.75)
TXD: JP2.6 U3.30 | length 43.2
  Top Layer w0.25: v1(36.434,33.816) 36.494,33.875 37.375,33.875 38.25,33 U3.30
  Bottom Layer w0.25: JP2.6 10.95,38.25 32,38.25 v1(36.434,33.816)
V_BATT: C14.2 JP5.1 JP6.11 R13.2 S2.2 U2.3 | length 87.8
  Top Layer w0.25: C14.2@51.75,39.2 51.95,39.4 U2.3 52,41 R13.2
  Top Layer w1: v1(51.75,37.75) C14.2@51.75,39.2
  Bottom Layer w0.25: S2.2@63.425,52.925 S2.2
  Bottom Layer w1: JP6.11 22.6,12.4 24.5,10.5 51.75,10.5 JP5.1 v1(51.75,37.75) 57.5,37.75 60.75,41 60.75,51.25 62.425,52.925 S2.2@63.425,52.925
V_BUS: C2.2 D3.1 JP3.A4 JP3.A9 JP3.B4 JP3.B9 U2.4 | length 47.2
  Top Layer w0.25: C2.2@51.95,44.9 C2.2 C2.2@52.05,45 ; JP3.A4 JP3.B9 60.845,31.335 61.26,31.75 ; JP3.A9 JP3.B4 60.845,35.935 60.96,35.82 62.571,35.82
  Top Layer w0.5: D3.1 53.75,50.02 53.75,46 ; U2.4 C2.2@51.95,44.9 ; C2.2@52.05,45 53.604,45 53.75,45.146 53.75,46 ; 61.26,31.75 62.5,31.75 63.25,32.5 63.25,35.141 62.571,35.82 62.571,43.429 60,46 53.75,46
V_IN: C10.1 S2.3 U1.1 U1.3 | length 26.2
  Top Layer w0.25: U1.3 44.675,45.075 44.675,45.675 45,46 46.15,46 46.4,45.75
  Top Layer w0.5: U1.1 46.4,45.75 46.4,46.6 46.519,46.719 46.519,48.481 v1(46.5,48.5)
  Bottom Layer w0.5: v1(46.5,48.5) 53,55 S2.3
VCC: C12.1 C13.2 C15.2 C18.2 JP2.7 JP4.1 JP6.10 JP7.4 L1.2 M1.2 R5.1 R8.1 R17.2 U1.5 U3.24 U3.48 U4.8 | length 186.5
  Top Layer w0.25: C18.2 11.525,15.325 U4.8 ; R17.2 13.25,26 ; C15.2 36.354,38.575 36.5,38.429 ; v1@36.33,40.479 v1(36.424,40.479) ; U3.48 36.5,38.429 ; v1@36.5,40.479 36.5,38.429 ; C13.2@42,27.425 U3.24 ; C13.2 43.464,27.425 43.78,27.741 v1(43.875,27.741) ; U1.5 46.412,42.488 46.412,39.491 v1(46.424,39.479) ; R8.1 v1@46.5,39.479
  Top Layer w0.5: JP2.7 8.38,26.38 ; R5.1 7.25,47 8.5,45.75 11.75,45.75 JP4.1@12.21,45.29 ; JP7.4 7.38,9.02 8.38,10.02 8.38,15.25 ; C18.2 8.38,15.25 ; JP4.1 JP4.1@12.21,45.29 ; M1.2 17.772,74.768 17.772,74.183 17.852,74.102 17.852,44.25 ; JP6.10 25.14,26 ; L1.2 31.515,27.765 29.75,26 25.14,26 ; v1@36.33,40.479 35.934,40.875 21.227,40.875 ; 8.38,15.25 8.38,26.38 ; 8.38,26.38 8.76,26 13.25,26 21.227,26 ; JP4.1@12.21,45.29 12.21,44.75 12.75,44.21 17.812,44.21 17.852,44.25 ; 17.852,44.25 21.227,40.875 ; 21.227,26 25.14,26 ; 21.227,26 21.227,40.875
  Bottom Layer w0.25: v1(36.424,40.479) v1@36.446,40.458 ; v1@46.404,39.5 v1(46.424,39.479)
  Bottom Layer w0.5: v1@36.446,40.458 36.446,39.804 36.75,39.5 44.5,39.5 ; v1(43.875,27.741) 43.875,27.768 44.5,28.393 44.5,39.5 ; v1@46.404,39.5 44.5,39.5
pads on no net: JP3.A8 JP3.B8 JP3.MH S2.1 U3.2

## Polygon pours and split planes (outlines as drawn)
GND on Bottom Layer "GND_L02_P000" (solid, remove dead copper, pour order 0): 0,0 66,0 66,85 0,85
GND on Top Layer "GND_L01_P002" (solid, remove dead copper, pour order 2): 0,0 66,0 66,85 0,85
GND on Top Layer "GND_L01_P001" (solid, remove dead copper, pour order 1): 23.5,38 23.5,26.75 30,26.75 30,38

## Keep-outs
Keep-Out Layer:
  the board outline again, w0.254

## Other copper
Top Layer:
  pour cut-out: 26,36.568 26,34.75 29.75,34.75 29.5,35 29.5,36.473

## Silkscreen, mask and mechanical layers (free items; w line width, h text height)
Top Overlay:
  text "BOOT" at 16.45,44.95 h1
  text "RST" at 6.7,44.2 h1
  text "SWCLK" at 6.7,41.95 h1
  text "SWDIO" at 6.7,39.45 h1
  text "GND" at 6.7,36.7 h1
  text "RXD" at 6.7,34.2 h1
  text "TXD" at 6.7,31.95 h1
  text "VCC" at 7.8,28.7 h1 r90
  text "M665 base board" at 26.004,22.754 h1.5
  text "(c) GBL 2025" at 25.754,19.004 h1.5
  text "+" at 52.496,12.504 h1.5 r90
  text "VCC" at 7.8,10.45 h1 r90
  text "IN" at 10.55,10.45 h1 r90
  text "OUT" at 13.05,10.45 h1 r90
  text "GND" at 15.55,10.45 h1 r90
  text "C3" at 25.55,6.7 h1 r90
  text "C2" at 27.922,6.588 h1 r90
  text "C1" at 30.422,6.588 h1 r90
  text "C0" at 32.922,6.588 h1 r90
  text "R3" at 35.422,6.588 h1 r90
  text "R2" at 38.172,6.588 h1 r90
  text "R1" at 40.672,6.588 h1 r90
  text "R0" at 43.172,6.588 h1 r90
Bottom Overlay:
  text "+" at 51.004,12.504 h1.5 r270
  text "GND" at 19.45,9.7 h1 r270
  text "INT" at 29.7,9.7 h1 r270
  text "SCK" at 37.2,9.7 h1 r270
  text "NSS" at 39.95,9.7 h1 r270
  text "GND" at 47.45,9.7 h1 r270
  text "RF block" at 16.754,9.504 h1.5 r270
  text "MOSI" at 32.2,8.95 h1 r270
  text "MISO" at 34.7,8.95 h1 r270
  text "+3V3" at 24.7,8.7 h1 r270
  text "RFEN" at 26.95,8.7 h1 r270
  text "BUSY" at 44.95,8.7 h1 r270
  text "+VBAT" at 22.2,7.7 h1 r270
  text "RESET" at 42.45,7.7 h1 r270

## Text inside footprints (layer, text, board x,y; h text height)
D1: Top Overlay "+" at 42.75,74.5 h1.5
D2: Top Overlay "+" at 42.5,67.25 h1.5
D3: Top Overlay "+" at 47.5,55.25 h1.5 r180